# Altium PCB E03_DAQ.PcbDoc
Units mm, origin at the board's own origin, x right, y up, seen from the top; angles counter-clockwise.
Board outline 113.79 x 123.19 mm, 2 copper layers (Top Layer, Bottom Layer); 49 components, 66 nets, 261 pads, 31 vias.
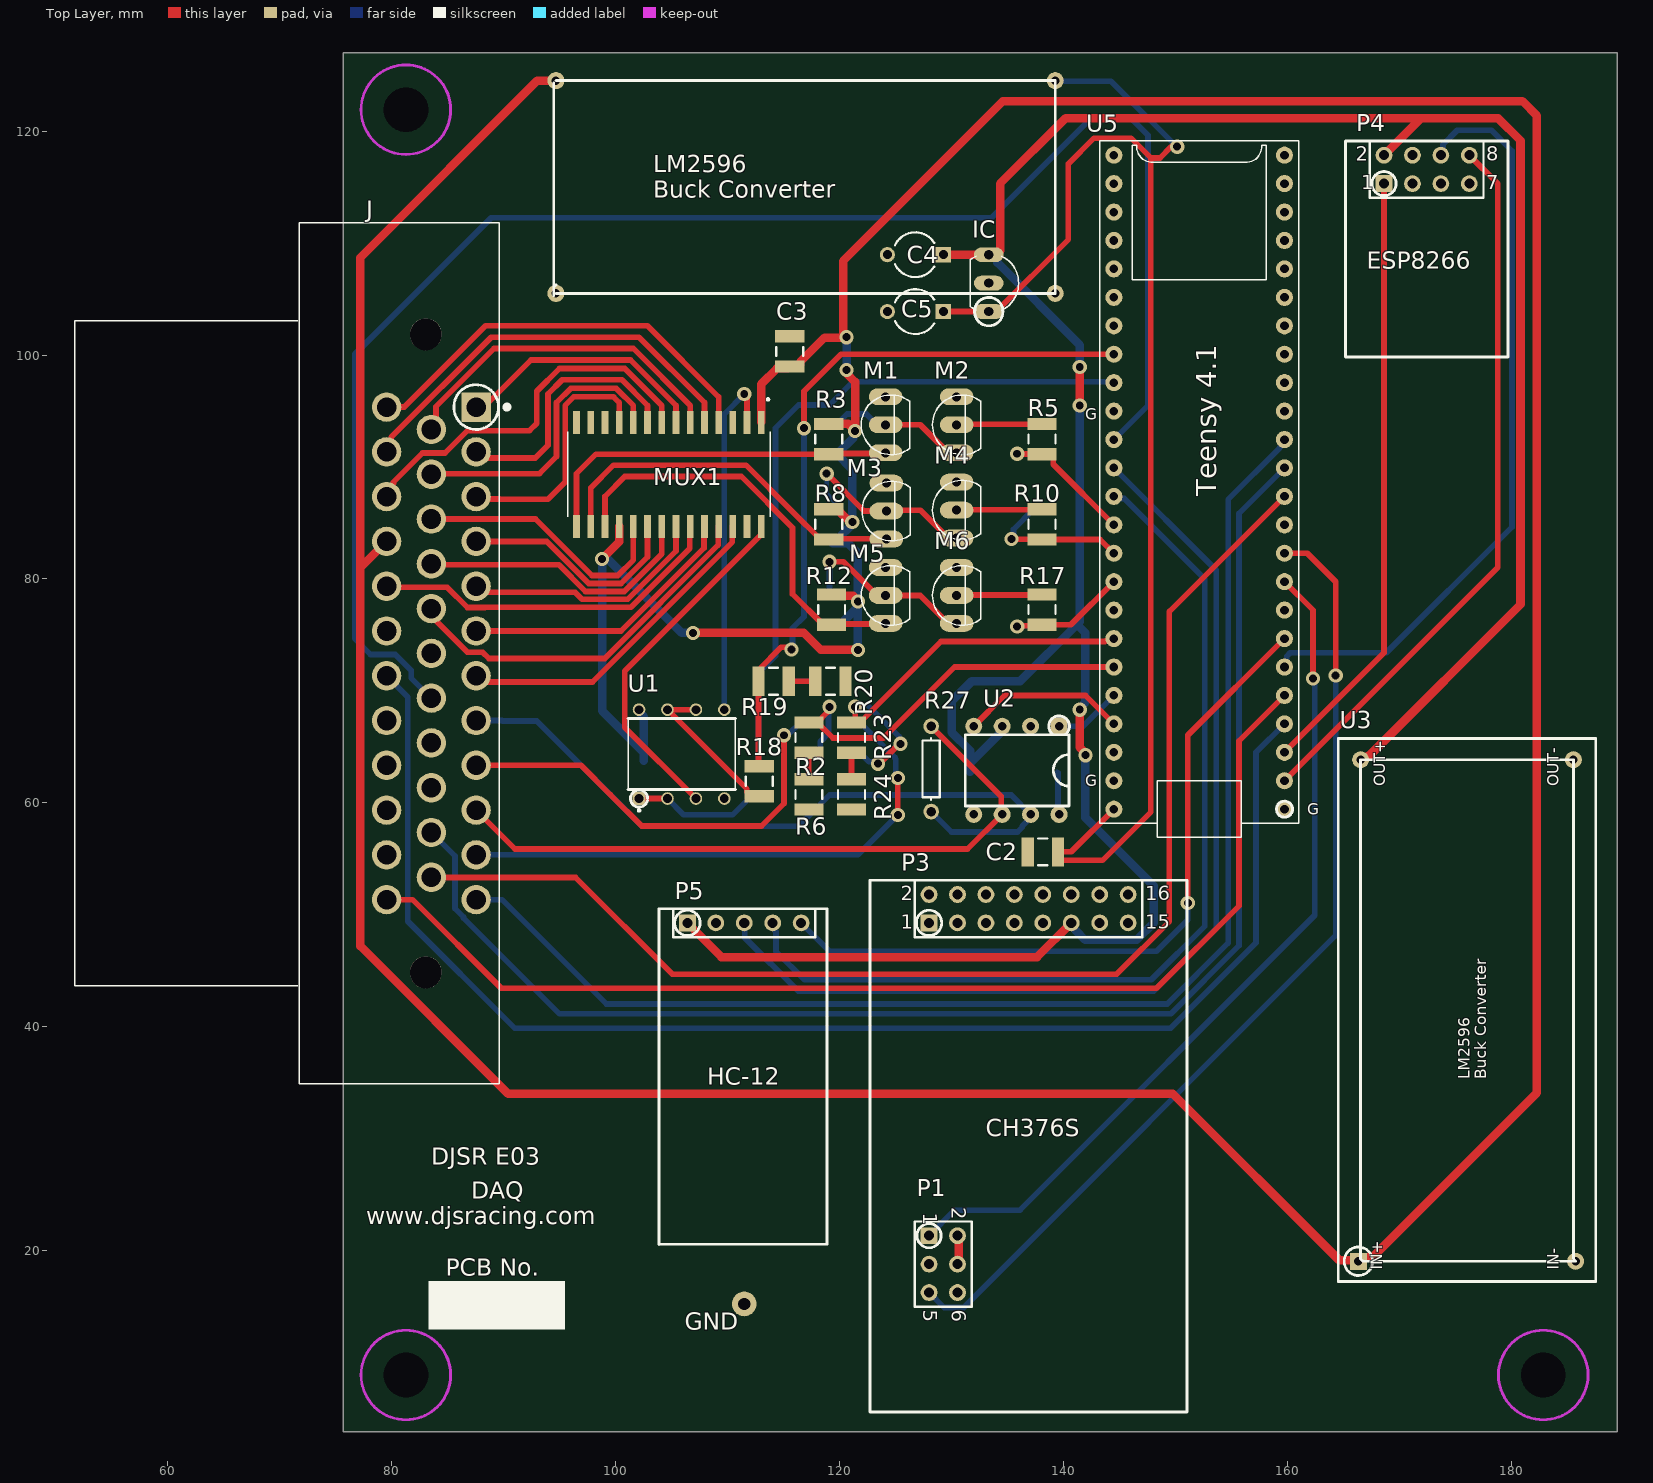
[diagram p0: Top Layer view]
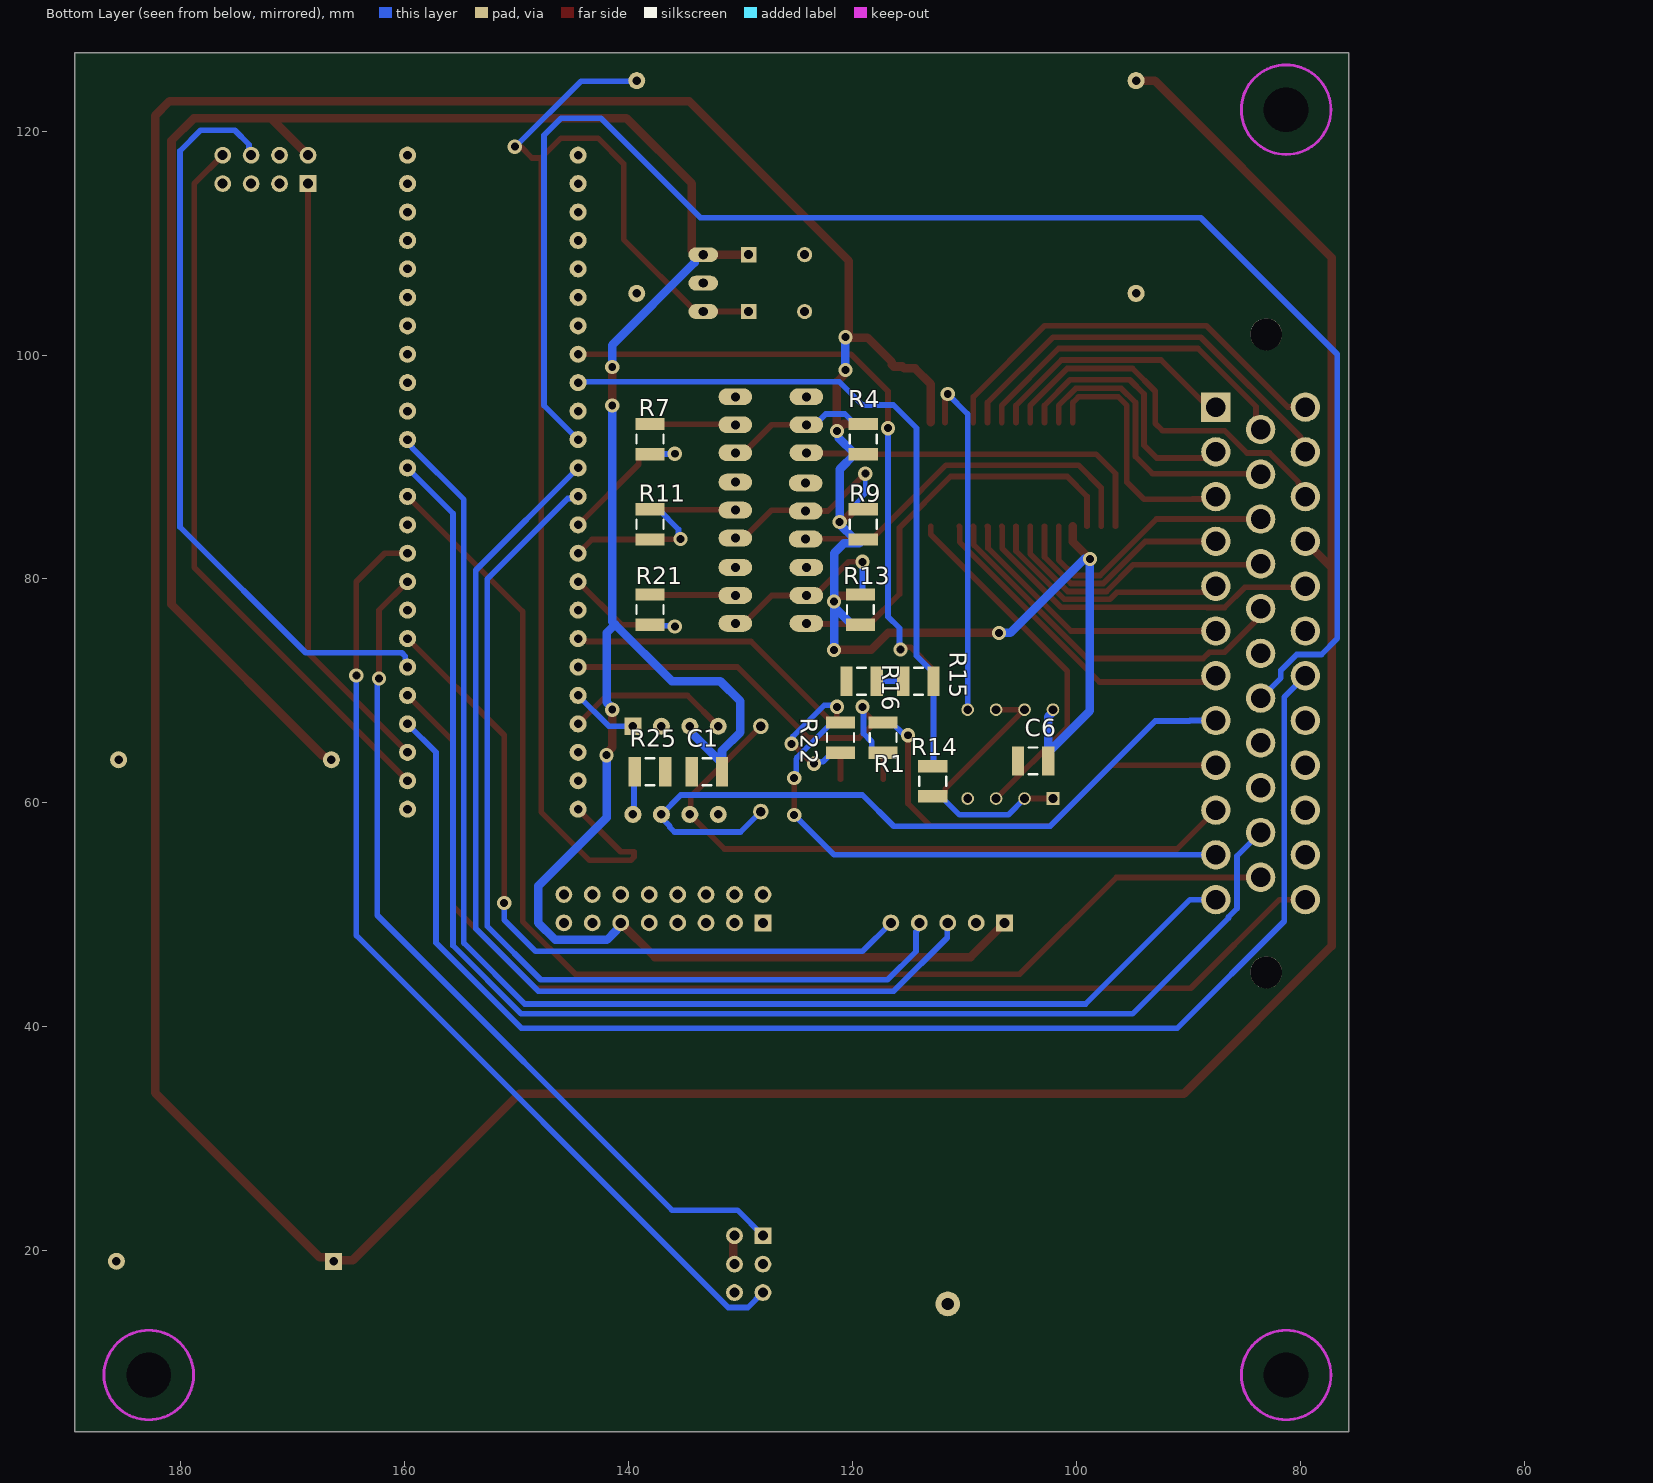
[diagram p1: Bottom Layer view, seen from below]

## Layer stack, top to bottom
Top Solder: solder mask 0.0102, Solder Resist, Dk 3.5
Top Layer: signal copper 0.0356
Dielectric 1: dielectric 0.32, FR-4, Dk 4.8
Bottom Layer: signal copper 0.0356
Bottom Solder: solder mask 0.0102, Solder Resist, Dk 3.5

## Board outline
75.692,3.81 189.484,3.81 189.484,127 75.692,127

## Design rules (kind name [scope] priority, off if disabled: settings)
Clearance [All] p1: gap=0.2 ignorepadtopadclearanceinfootprint=FALSE except(0.127: SMDPad-SMDPad; 0.254: Arc-Via Arc-Hole Track-Via Track-Hole Via-Via; 0.33: Arc-THPad Track-THPad; 0.54: THPad-THPad)
PolygonConnect [All] p1: connectstyle=Relief reliefconductorwidth=0.254 reliefentries=4 polygonreliefangle="90 Angle" airgapwidth=0.254
RoutingVias [All] p1: holewidth=0.711 width=1.27 viastyle="Through Hole" minholewidth=0.711 minwidth=1.27 maxholewidth=0.711 maxwidth=1.27
SolderMaskExpansion [All] p1: expansion=0.102
Width [All] p1: maxlimit=1.016 minlimit=0.381 preferedwidth=0.508
30 further rules are at their usual default settings.

## Components (designator, comment, footprint, x,y, rotation, side; value= is the part's Value field where it differs from the comment)
C1 "Cap Semi" C1210 133.024,62.782 r180 bottom value=100pF
C2 "Cap Semi" C1210 138.176,55.626 r0 top value=100pF
C3 "Cap Semi" C1210 115.57,100.33 r270 top value=100pF
C4 "Cap2" CAPR5-4X5 126.786,108.966 r180 top value=100pF
C5 "Cap2" CAPR5-4X5 126.786,103.886 r180 top value=100pF
C6 "Cap Semi" C1210 103.886,63.754 r180 bottom value=100pF
IC "L78L33ACZ" TO92 133.35,106.426 r90 top
J "776163-1" TE_776163-1 83.058,73.354 r270 top
M1 "BS170" TRANSISTOR_TO-92 124.134,93.77 r90 top
M2 "BS170" TRANSISTOR_TO-92 130.484,93.77 r90 top
M3 "BS170" TRANSISTOR_TO-92 124.206,86.066 r90 top
M4 "BS170" TRANSISTOR_TO-92 130.484,86.15 r90 top
M5 "BS170" TRANSISTOR_TO-92 124.134,78.53 r90 top
M6 "BS170" TRANSISTOR_TO-92 130.484,78.53 r90 top
MUX1 "Component_1" *SOIC127P1030X265-28N 104.775,89.34 r270 top
P1 "Header 3X2" HDR2X3 128.016,21.336 r270 top
P3 "CH376S Header 1" HDR2X8 128.016,49.276 r0 top
P4 "ESP8266" HDR2X4 168.656,115.316 r0 top
P5 "HC-12" HDR1X5 106.426,49.276 r0 top
R1 "Res3" 14-1210 117.276,65.83 r270 bottom value=1K
R2 "Res3" 14-1210 117.276,65.83 r270 top value=1K
R3 "Res3" 14-1210 119.054,92.5 r90 top value=1K
R4 "Res3" 14-1210 119.054,92.5 r270 bottom value=1M
R5 "Res3" 14-1210 138.104,92.5 r90 top value=1M
R6 "Res3" 14-1210 117.276,60.75 r270 top value=1K
R7 "Res3" 14-1210 138.104,92.5 r270 bottom value=1K
R8 "Res3" 14-1210 119.054,84.88 r90 top value=1K
R9 "Res3" 14-1210 119.054,84.88 r90 bottom value=1M
R10 "Res3" 14-1210 138.104,84.88 r90 top value=1M
R11 "Res3" 14-1210 138.104,84.88 r90 bottom value=1K
R12 "Res3" 14-1210 119.308,77.26 r90 top value=1K
R13 "Res3" 14-1210 119.308,77.26 r90 bottom value=1M
R14 "Res3" 14-1210 112.848,61.932 r90 bottom value=1K
R15 "Res3" 14-1210 114.126,70.866 r0 bottom value=1K
R16 "Res3" 14-1210 119.206,70.866 r0 bottom value=1K
R17 "Res3" 14-1210 138.104,77.26 r90 top value=1M
R18 "Res3" 14-1210 112.848,61.932 r90 top value=1K
R19 "Res3" 14-1210 114.126,70.866 r0 top value=1K
R20 "Res3" 14-1210 119.206,70.866 r0 top value=1K
R21 "Res3" 14-1210 138.104,77.26 r270 bottom value=1K
R22 "Res3" 14-1210 121.086,65.83 r270 bottom value=1K
R23 "Res3" 14-1210 121.086,65.83 r270 top value=1K
R24 "Res3" 14-1210 121.086,60.75 r270 top value=1K
R25 "Res3" 14-1210 138.104,62.782 r180 bottom value=10K
R27 "Res1" AXIAL-0.3 128.198,63.036 r270 top value=120
U1 "LM358AP" DIP794W45P254L959H508Q8 105.918,64.356 r90 top
U2 "MCP2551 IC" PCBComponent_1#1 139.628,66.846 r180 top
U3 "DC_DC Converter" PCBComponent_1#2 185.77,19.05 r90 top
U5 "Teensy" PCBComponent_1#3 157.48,91.694 r180 top

## Footprints (in the part's own frame and the unit in brackets; to place one, negate y for a bottom-side part, rotate by r counter-clockwise, add the part's x,y. Pads: shape width x height; smd on the part's side, far side on the other; paste and mask are expansions set on the pad)
14-1210 [mm] "Chip Resistor, Body 3.2x2.5mm, IPC High Density"
  rect 1.1x2.6 smd: 1(-1.35,0) 2(1.35,0)
  silkscreen extent -0.4,-1.2 0.4,1.2, body extent -1.68,-1.32 1.68,1.32, height 0.9
*SOIC127P1030X265-28N [mm]
  rect 2.06x0.6 smd: 1(-4.64,8.255) 2(-4.64,6.985) 3(-4.64,5.715) 4(-4.64,4.445) 5(-4.64,3.175) 6(-4.64,1.905) 7(-4.64,0.635) 8(-4.64,-0.635) 9(-4.64,-1.905) 10(-4.64,-3.175) 11(-4.64,-4.445) 12(-4.64,-5.715) 13(-4.64,-6.985) 14(-4.64,-8.255) 15(4.64,-8.255) 16(4.64,-6.985) 17(4.64,-5.715) 18(4.64,-4.445) 19(4.64,-3.175) 20(4.64,-1.905) 21(4.64,-0.635) 22(4.64,0.635) 23(4.64,1.905) 24(4.64,3.175) 25(4.64,4.445) 26(4.64,5.715) 27(4.64,6.985) 28(4.64,8.255)
  silkscreen extent -6.8,-9.05 3.8,9.05
AXIAL-0.3 [mm] "Axial Device, Thru-Hole; 2 Leads; 0.3 in Pin Spacing"
  round 1.4 hole 0.85: 1(-3.81,0) 2(3.81,0)
  silkscreen extent -2.77,-0.76 2.77,0.76
C1210 [mm] "Chip Capacitor, Body 3.2x2.5mm, IPC High Density"
  rect 1.1x2.6 smd: 1(-1.35,0) 2(1.35,0)
  silkscreen extent -0.4,-1.2 0.4,1.2, body extent -1.7,-1.35 1.7,1.35, height 1.3
CAPR5-4X5 [mm] "Capacitor; 2 Leads"
  rect 1.35x1.35 hole 0.8: 1(-2.5,0)
  round 1.35 hole 0.8: 2(2.5,0)
  silkscreen extent -1.69,-2 1.82,2
DIP794W45P254L959H508Q8 [mm]
  rect 1.13x1.13 hole 0.78: 1(-3.97,3.81)
  round 1.13 hole 0.78: 2(-3.97,1.27) 3(-3.97,-1.27) 4(-3.97,-3.81) 5(3.97,-3.81) 6(3.97,-1.27) 7(3.97,1.27) 8(3.97,3.81)
  silkscreen extent -5.13,-4.8 3.17,4.8
HDR1X5 [mm] "Connector; Header; 5 Position"
  rect 1.5x1.5 hole 0.9: 1(0,0)
  round 1.5 hole 0.9: 2(2.54,0) 3(5.08,0) 4(7.62,0) 5(10.16,0)
  silkscreen extent -1.27,-1.27 11.43,1.27
HDR2X3 [mm] "Connector; Header; 3x2 Position"
  rect 1.5x1.5 hole 0.9: 1(0,0)
  round 1.5 hole 0.9: 2(0,2.54) 3(2.54,0) 4(2.54,2.54) 5(5.08,0) 6(5.08,2.54)
  silkscreen extent -1.27,-1.27 6.35,3.81
HDR2X4 [mm] "Connector; Header; 4x2 Position"
  rect 1.5x1.5 hole 0.9: 1(0,0)
  round 1.5 hole 0.9: 2(0,2.54) 3(2.54,0) 4(2.54,2.54) 5(5.08,0) 6(5.08,2.54) 7(7.62,0) 8(7.62,2.54)
  silkscreen extent -1.27,-1.27 8.89,3.81
HDR2X8 [mm] "Connector; Header; 8x2 Position"
  rect 1.5x1.5 hole 0.9: 1(0,0)
  round 1.5 hole 0.9: 2(0,2.54) 3(2.54,0) 4(2.54,2.54) 5(5.08,0) 6(5.08,2.54) 7(7.62,0) 8(7.62,2.54) 9(10.16,0) 10(10.16,2.54) 11(12.7,0) 12(12.7,2.54) 13(15.24,0) 14(15.24,2.54) 15(17.78,0) 16(17.78,2.54)
  silkscreen extent -1.27,-1.27 19.05,3.81
PCBComponent_1#1 [mil]
  rect 60x60 hole 30: 1(0,0)
  round 60 hole 30: 2(100,0) 3(200,0) 4(300,0) 5(300,310) 6(200,310) 7(100,310) 8(0,310)
  silkscreen extent -35,30 330,280
PCBComponent_1#2 [mil]
  rect 60x60 hole 30: 1(0,763.78)
  round 60 hole 30: 2(0,0) 3(1763.78,755.91) 4(1763.78,7.87)
  silkscreen extent -71,-71 1839,835
PCBComponent_1#3 [mil]
  round 60 hole 30: 1(-90,1270) 2(-90,1170) 3(-90,1070) 4(-90,970) 5(-90,870) 6(-90,770) 7(-90,670) 8(-90,570) 9(-90,470) 10(-90,370) 11(-90,270) 12(-90,170) 13(-90,70) 14(-90,-30) 15(-90,-130) 16(-90,-230) 17(-90,-330) 18(-90,-430) 19(-90,-530) 20(-90,-630) 21(-90,-730) 22(-90,-830) 23(-90,-930) 24(-90,-1030) 25(510,-1030) 26(510,-930) 27(510,-830) 28(510,-730) 29(510,-630) 30(510,-530) 31(510,-430) 32(510,-330) 33(510,-230) 34(510,-130) 35(510,-30) 36(510,70) 37(510,170) 38(510,270) 39(510,370) 40(510,470) 41(510,570) 42(510,670) 43(510,770) 44(510,870) 45(510,970) 46(510,1070) 47(510,1170) 48(510,1270)
  silkscreen extent -140,-1080 560,1369
TE_776163-1 [mm]
  rect 2.625x2.625 hole 1.75: 1(-22,4.5)
  round 2.625 hole 1.75: 2(-18,4.5) 3(-14,4.5) 4(-10,4.5) 5(-6,4.5) 6(-2,4.5) 7(2,4.5) 8(6,4.5) 9(10,4.5) 10(14,4.5) 11(18,4.5) 12(22,4.5) 13(-20,0.5) 14(-16,0.5) 15(-12,0.5) 16(-8,0.5) 17(-4,0.5) 18(0,0.5) 19(4,0.5) 20(8,0.5) 21(12,0.5) 22(16,0.5) 23(20,0.5) 24(-22,-3.5) 25(-18,-3.5) 26(-14,-3.5) 27(-10,-3.5) 28(-6,-3.5) 29(-2,-3.5) 30(2,-3.5) 31(6,-3.5) 32(10,-3.5) 33(14,-3.5) 34(18,-3.5) 35(22,-3.5)
  round 2.85 hole 2.85 unplated: ""(-28.5,0) ""(28.5,0)
  silkscreen extent -38.45,-31.35 38.45,7.45
TO92 [mil]
  oval 52x104 hole 32: 1(-100,0) 2(0,0) 3(100,0)
  silkscreen extent -95,-105 95,65
TRANSISTOR_TO-92 [mm]
  oval 1.5x3 hole 0.8: P$1(2.5,0) P$2(0,0) P$3(-2.5,0)
  silkscreen extent -2.67,-2.15 2.66,2.17

## Part data
C1 C2 C3 C6: "Capacitor (Semiconductor SIM Model)", LatestRevisionDate=29-May-2009, LatestRevisionNote="IPC-7351 Footprint Added.", PackageDescription="Chip Capacitor", PackageReference=C1206, Published=8-Jun-2000, Publisher="Altium Limited"
C4 C5: "Capacitor", PackageDescription="Capacitor; 2 Leads", PackageReference=CAPR5-4X5, Published=23-Sep-2002, Publisher="Altium Limited"
IC: "Linear Voltage Regulator IC 1 Output 100mA TO-92-3", Package="TO-92 STMicroelectronics", Availability=Unavailable, MF=STMicroelectronics, MP=L78L33ACZ, Price=None, SnapEDA_Link=https://www.snapeda.com/parts/L78L33ACZ/STMicroelectronics/view-part/50061/?ref=snap
J: "Rectangular Power Connector, AMPSEAL Series, Through Hole, Plug, 35, 4 mm, Pin", Package=None, Digi-Key_Part_Number=A106460-ND, Digi-Key_Purchase_URL=https://www.digikey.com/product-detail/en/te-connectivity-amp-connectors/776163-1/A106460-ND/2327364?utm_source=snapeda&utm_medium=aggregator&utm_campaign=symbol, EU_RoHS_Compliance=Compliant, MF="TE Connectivity", MP=776163-1, SnapEDA_Link=https://www.snapeda.com/parts/776163-1/TE%20Connectivity%20AMP%20Connectors/view-part/546665/?ref=snap, TE_purchase_URL=https://www.te.com/usa-en/product-776163-1.html?te_bu=Cor&te_type=disp&te_campaign=seda_glo_cor-seda-global-disp-prtnr-fy19-seda-model-bom-cta_sma-317_1&elqCampaignId=32493
M1 M2 M3 M4 M5 M6: "N-Channel 60V 500mA (Ta) 830mW (Ta) Through Hole TO-92-3", Package="TO-92 ON Semiconductor", Arrow_Electronics-Purchase-URL=https://snapeda.com/shop?store=Arrow+Electronics&id=4775089, Availability=Good, DigiKey-Purchase-URL=https://snapeda.com/shop?store=DigiKey&id=4775089, MF="ON Semiconductor", Mouser-Purchase-URL=https://snapeda.com/shop?store=Mouser&id=4775089, MP=BS170, Price=None, SnapEDA_Link=https://www.snapeda.com/parts/BS170/ON%20Semiconductor/view-part/4775089/?ref=snap
P1: "Header, 3-Pin, Dual row", LatestRevisionDate=17-Jul-2002, LatestRevisionNote="Re-released for DXP Platform.", Publisher="Altium Limited"
P3: library part "Header 8X2", "Header, 8-Pin, Dual row", LatestRevisionDate=17-Jul-2002, LatestRevisionNote="Re-released for DXP Platform.", Publisher="Altium Limited"
P4: library part "Header 4X2", "Header, 4-Pin, Dual row", LatestRevisionDate=17-Jul-2002, LatestRevisionNote="Re-released for DXP Platform.", Publisher="Altium Limited"
P5: library part "Header 5", "Header, 5-Pin", LatestRevisionDate=17-Jul-2002, LatestRevisionNote="Re-released for DXP Platform.", Publisher="Altium Limited"
R1 R2 R3 R4 R5 R6 R7 R8 R9 R10 R11 R12 R13 R14 R15 R16 R17 R18 R19 R20 R21 R22 R23 R24 R25 R27: "Resistor", Published=8-Jun-2000, Publisher="Altium Limited"
  R1 R2 R3 R4 R5 R6 R7 R8 R9 R10 R11 R12 R13 R14 R15 R16 R17 R18 R19 R20 R21 R22 R23 R24 R25: LatestRevisionDate=29-May-2009, LatestRevisionNote="IPC-7351 Footprint Added.", PackageDescription="Chip Resistor", PackageReference=J1-0603
  R27: LatestRevisionDate=17-Jul-2002, LatestRevisionNote="Re-released for DXP Platform.", PackageDescription="Axial Device, Thru-Hole; 2 Leads; 0.3 in Pin Spacing", PackageReference=AXIAL-0.3
U1: "Dual improved offset, standard operational amplifier<br /> &nbsp; 8-PDIP 0 to 70", Package="PDIP-8 Texas Instruments", Availability=Unavailable, MF="Texas Instruments", MP=LM358AP, Price=None, SnapEDA_Link=https://www.snapeda.com/parts/LM358AP/Texas%20Instruments/view-part/214423/?ref=snap, Texas_Instruments-Purchase-URL=https://snapeda.com/shop?store=Texas+Instruments&id=214423
U2: library part MCP2551
U3: library part LM2576
U5: library part "Teensy 4.1"

## Free pads (board coordinates)
  round 2.2 hole 1.1: 2(111.506,15.24)
  round 1.524 hole 0.762: 6(94.688,105.514) 6(94.688,124.514) 6(139.288,105.514) 6(139.288,124.514)
  round 1.524 hole 4: 7(81.28,8.89) 7(81.28,121.92) 7(182.88,8.89)

## Via types
v1: diameter 1.27, hole 0.711, Top Layer to Bottom Layer, 31 vias

## Nets (pads, with @x,y where several pads share a name; then routed paths per layer and width w, separated by ;. In a path a pad name is that pad's centre, name@x,y a point inside that pad or via, vN(x,y) a via of type N, cw(c..) or ccw(c..) an arc to the next point about the centre after c; other vN are vias at no path point)
1OUT: R14.1 U1.1 U1.2 | length 12
  Top Layer w0.508: U1.1 U1.2
  Bottom Layer w0.508: U1.2 106.106,58.928 110.444,58.928 112.098,60.582 R14.1
2OUT: R18.1 U1.6 U1.7 | length 14.1
  Top Layer w0.508: U1.6 U1.7 111.739,61.235 111.739,60.942 112.098,60.582 R18.1
3.3V: C2.2 C5.1 IC.1 pad.6@139.288,124.514 U5.48 | length 121.4
  Top Layer w0.508: C5.1 IC.1 134.01,103.886 140.462,110.338 140.462,117.094 142.748,119.38 146.05,119.38 147.828,117.602 ; U5.48 140.716,55.626 C2.2 139.526,55.16 139.822,54.864 143.51,54.864 147.828,59.182 147.828,117.602 ; v1(150.177,118.618) 149.654,118.618 148.638,117.602 147.828,117.602
  Bottom Layer w0.508: pad.6@139.288,124.514 139.342,124.46 144.272,124.46 150.114,118.618 v1(150.177,118.618)
5V: C1.2 C4.1 IC.3 P3.11 P4.2 P5.1 U2.3 U3.3 | length 264.8
  Top Layer w0.508: IC.3 134.01,108.966 IC.3@134.366,109.322
  Top Layer w0.762: P5.1 109.474,46.228 137.668,46.228 P3.11 ; C4.1 IC.3 ; IC.3@134.366,109.322 134.366,115.316 140.208,121.158 171.958,121.158 ; v1(141.478,68.326) 141.478,64.952 141.986,64.444 v1(141.986,64.262) ; v1(141.478,95.504) v1(141.478,98.933) ; U3.3@166.828,63.799 167.239,64.21 167.334,64.21 180.848,77.724 180.848,119.157 178.847,121.158 171.958,121.158 ; P4.2 171.958,121.158
  Bottom Layer w0.762: C1.2 C1.2@131.674,63.532 ; IC.3@133.246,109.07 133.755,109.07 134.117,108.708 134.117,108.259 141.478,100.898 v1(141.478,98.933) ; U2.3 134.329,66.627 134.329,66.187 C1.2@131.674,63.532 ; P3.11 140.716,49.008 141.133,48.591 141.133,48.571 141.951,47.752 146.558,47.752 148.082,49.276 148.082,52.578 141.986,58.674 v1(141.986,64.262) ; v1(141.478,68.326) 141.478,68.486 141.986,68.994 141.986,75.184 141.224,75.946 ; v1(141.478,95.504) 141.478,76.2 141.224,75.946 ; C1.2@131.674,63.532 131.674,64.668 130.048,66.294 130.048,69.088 131.826,70.866 136.144,70.866 141.224,75.946
+12: C3.2 C6.2 J.27 MUX1.1 MUX1.18 pad.6@94.688,124.514 R3.2 R4.2 R8.2 R9.1 R12.2 R13.1 U1.8 U3.1 | length 483.5
  Top Layer w0.381: R8.2 R8.2@119.804,86.23 ; v1@120.944,85.09 v1(121.158,85.09)
  Top Layer w0.762: J.27 77.216,81.012 ; pad.6@94.688,124.514 93.018,124.514 77.216,108.712 77.216,81.012 ; v1(98.806,81.788) 100.328,83.31 100.328,84.698 MUX1.18 ; v1(106.934,75.184) 116.84,75.184 118.364,73.66 v1(121.666,73.66) ; MUX1.1 113.03,97.412 114.429,98.811 115.401,98.811 C3.2 116.32,98.98 116.489,99.149 116.489,99.371 118.686,101.568 120.618,101.568 v1(120.65,101.6) 120.65,101.737 120.339,102.048 120.339,108.401 134.62,122.682 181.013,122.682 182.315,121.38 182.315,34.108 167.622,19.414 166.734,19.414 U3.1 166.271,19.149 164.657,19.149 149.803,34.004 90.424,34.004 77.216,47.212 77.216,81.012 ; R3.2 120.778,93.85 121.41,93.218 v1(121.412,93.218) 121.412,97.608 120.65,98.37 v1(120.65,98.679) ; R12.2 119.432,78.486 121.237,78.486 ; R8.2@119.804,86.23 v1@120.944,85.09
  Bottom Layer w0.381: R13.1 R13.1@120.058,75.91 ; v1@120.65,98.615 v1(120.65,98.679)
  Bottom Layer w0.762: U1.8 102.108,68.123 102.536,67.695 C6.2@102.536,64.504 ; C6.2 C6.2@102.536,64.504 ; v1(106.934,75.184) 105.918,75.184 99.314,81.788 v1(98.806,81.788) 98.806,68.234 C6.2@102.536,64.504 ; R4.2 R4.2@119.804,91.15 ; R13.1@120.058,75.91 121.496,77.348 ; v1(120.65,98.679) v1(120.65,101.6) ; 121.242,92.588 R4.2@119.804,91.15 ; v1(121.666,73.66) v1(121.666,77.978) 121.666,82.296 120.792,83.17 119.414,83.17 R9.1 119.804,83.53 121.158,84.884 v1(121.158,85.09) 121.158,89.796 R4.2@119.804,91.15
A0: M5.P$3 MUX1.17 R12.1 | length 37.5
  Top Layer w0.508: MUX1.17 99.06,87.376 100.838,89.154 111.252,89.154 115.824,84.582 115.824,78.644 118.558,75.91 R12.1 119.368,75.97 124.074,75.97 M5.P$3
A1: M3.P$3 MUX1.16 R8.1 | length 33.3
  Top Layer w0.508: MUX1.16 97.79,88.138 99.822,90.17 111.664,90.17 115.824,86.01 118.304,83.53 R8.1 119.114,83.59 M3.P$3@124.074,83.59
A2: M1.P$3 MUX1.15 R3.1 | length 33.1
  Top Layer w0.381: R3.1 R3.1@119.114,91.21 ; M1.P$3@124.074,91.21 M1.P$3
  Top Layer w0.508: MUX1.15 96.52,89.408 98.262,91.15 R3.1 ; R3.1@119.114,91.21 M1.P$3@124.074,91.21
CAN_RX: U2.4 U5.45 | length 14.7
  Top Layer w0.508: U2.4 134.758,69.596 141.986,69.596 U5.45
CAN_TX: U2.1 U5.44 | length 6
  Bottom Layer w0.508: U2.1 141.776,66.846 U5.44
CANH: J.8 R27.2 U2.7 | length 65.8
  Bottom Layer w0.508: J.8 89.874,67.354 89.918,67.31 92.964,67.31 102.362,57.912 116.338,57.912 119.132,60.706 135.354,60.706 U2.7 137.088,58.663 136.33,57.905 136.33,57.814 135.921,57.404 130.02,57.404 R27.2
CANL: J.10 R27.1 U2.6 | length 60.2
  Top Layer w0.508: J.10 91.032,55.88 131.456,55.88 U2.6 134.463,59.057 134.463,60.581 R27.1
CH_EN: P4.6 U5.6 | length 68
  Bottom Layer w0.508: U5.6 159.956,72.326 159.956,73.086 160.276,73.406 168.862,73.406 180.088,84.632 180.088,118.24 178.249,120.079 175.199,120.079 173.917,118.797 173.917,118.037 P4.6
CH_RX: P1.5 U5.10 | length 87.9
  Top Layer w0.508: U5.10 161.798,82.296 164.338,79.756 v1(164.338,71.374)
  Bottom Layer w0.508: P1.5 128.029,16.256 129.363,14.922 131.109,14.922 164.335,48.148 164.335,71.371 v1(164.338,71.374)
CH_TX: P1.1 U5.9 | length 77.2
  Top Layer w0.508: U5.9 162.306,77.216 v1(162.306,71.12)
  Bottom Layer w0.508: P1.1 130.302,23.622 136.144,23.622 162.476,49.954 162.476,70.95 v1(162.306,71.12)
CS: J.23 U5.12 | length 113.7
  Top Layer w0.508: J.23@83.558,53.34 96.442,53.34 105.078,44.704 144.78,44.704 149.479,49.403 149.479,77.089 U5.12
D0: R17.1 R21.2 U5.40 | length 12.6
  Top Layer w0.508: v1(135.89,75.755) 135.967,75.833 138.027,75.833 R17.1 140.68,75.91 U5.40
  Bottom Layer w0.508: v1(135.89,75.755) 135.967,75.833 138.027,75.833 R21.2
D1: R10.1 R11.2 U5.39 | length 13.9
  Top Layer w0.508: v1(135.382,83.566) 135.4,83.548 138.086,83.548 R10.1 143.292,83.53 U5.39
  Bottom Layer w0.508: v1(135.382,83.566) 135.552,83.736 135.552,84.428 137.354,86.23 R11.2
D2: R5.1 R7.2 U5.38 | length 13.9
  Top Layer w0.508: v1(135.89,91.186) 135.908,91.168 138.086,91.168 R5.1 138.818,91.15 139.114,90.854 139.114,90.248 U5.38
  Bottom Layer w0.381: v1(135.89,91.186) v1@135.908,91.168 ; R7.2@138.086,91.168 R7.2
  Bottom Layer w0.508: v1@135.908,91.168 R7.2@138.086,91.168
DA: MUX1.28 U1.3 | length 32
  Top Layer w0.508: U1.3 100.838,66.736 100.838,71.778 113.03,83.97 MUX1.28
DB: MUX1.2 U1.5 | length 31.6
  Top Layer w0.508: v1(111.506,96.52) 111.506,96.314 111.76,96.06 MUX1.2
  Bottom Layer w0.508: U1.5 109.728,94.742 v1(111.506,96.52)
DC: J.30 U5.4 | length 126.2
  Bottom Layer w0.508: J.30 81.454,69.457 81.454,49.421 90.998,39.878 149.606,39.878 157.226,47.498 157.226,64.516 U5.4
ESP_RX: P4.1 U5.3 | length 54.5
  Top Layer w0.508: U5.3 168.656,73.406 P4.1
ESP_TX: P4.8 U5.2 | length 64.8
  Top Layer w0.508: U5.2 178.817,81.027 178.817,115.313 176.276,117.853 P4.8
GND: C1.1 C2.1 C3.1 C4.2 C5.2 C6.1 IC.2 J.20 M1.P$1 M2.P$1 M3.P$1 M4.P$1 M5.P$1 M6.P$1 MUX1.12 MUX1.27 P1.3 P3.15 P4.7 P5.2 pad.2 pad.6@94.688,105.514 pad.6@139.288,105.514 R6.2 R7.1 R11.1 R16.2 R20.2 R21.1 R24.2 R25.2 U1.4 U2.2 U3.2 U3.4 U5.1
HC-12_RX: P5.3 U5.36 | length 92.7
  Bottom Layer w0.508: P5.3 111.558,49.224 111.558,47.954 116.332,43.18 148.082,43.18 153.67,48.768 153.67,80.772 U5.36
HC-12_SET: P5.5 U5.7 | length 65.5
  Top Layer w0.508: v1(151.13,51.054) 151.13,66.04 U5.7
  Bottom Layer w0.508: P5.5 119.123,46.739 148.339,46.739 151.13,49.53 v1(151.13,51.054)
HC-12_TX: P5.4 U5.37 | length 86.2
  Bottom Layer w0.508: P5.4 114.236,49.086 114.236,48.59 114.343,48.482 114.343,46.736 116.883,44.196 147.862,44.196 152.654,48.988 152.654,79.98 145.452,87.182 144.72,87.182 U5.37
MISO: J.12 U5.14 | length 120.4
  Bottom Layer w0.508: J.12 89.874,51.354 99.192,42.036 149.288,42.036 154.729,47.477 154.729,87.101 159.356,91.727 159.356,91.771 159.766,92.181 U5.14
MOSI: J.22 U5.13 | length 128.5
  Bottom Layer w0.508: J.22 85.662,55.251 85.662,50.568 86.424,49.806 86.424,49.72 94.996,41.148 149.606,41.148 155.702,47.244 155.702,85.852 U5.13
NetM1_P$2: M1.P$2 M2.P$3 R4.1 | length 13.2
  Top Layer w0.508: M1.P$2 127.234,93.77 129.734,91.27 M2.P$3
  Bottom Layer w0.508: R4.1 119.804,93.85 120.696,94.742 122.412,94.742 123.384,93.77 M1.P$2
NetM2_P$2: M2.P$2 R5.2 | length 7.7
  Top Layer w0.508: M2.P$2 130.524,93.81 138.064,93.81 R5.2
NetM3_P$2: M3.P$2 M4.P$3 R9.2 | length 18.3
  Top Layer w0.508: v1(118.872,89.408) 122.214,86.066 M3.P$2 ; M3.P$2@124.134,86.15 127.234,86.15 129.734,83.65 M4.P$3
  Bottom Layer w0.381: v1(118.872,89.408) 118.872,87.606 119.888,86.59 119.528,86.23 R9.2
NetM4_P$2: M4.P$2 R10.2 | length 7.7
  Top Layer w0.508: M4.P$2 130.524,86.19 138.064,86.19 R10.2
NetM5_P$2: M5.P$2 M6.P$3 R13.2 | length 16.6
  Top Layer w0.508: v1(119.126,81.534) 120.38,81.534 123.384,78.53 M5.P$2 127.234,78.53 129.734,76.03 M6.P$3
  Bottom Layer w0.508: v1(119.126,81.534) 119.126,78.792 R13.2
NetM6_P$2: M6.P$2 R17.2 | length 7.7
  Top Layer w0.508: M6.P$2 130.524,78.57 138.064,78.57 R17.2
NetP1_2: P1.2 P1.4 | length 5.1
  Top Layer w0.508: P1.4 P1.2 ; P1.4@130.81,18.542 P1.2@130.81,21.082
NetR2_2: R2.2 R6.1 | length 2.4
  Top Layer w0.508: R6.1 R2.2
NetR15_2: R15.2 R16.1 | length 2.4
  Bottom Layer w0.508: R15.2 R16.1
NetR19_2: R19.2 R20.1 | length 2.4
  Top Layer w0.508: R19.2 R20.1
NetR23_2: R23.2 R24.1 | length 2.4
  Top Layer w0.508: R24.1 R23.2
NetR25_1: R25.1 U2.8 | length 3.9
  Bottom Layer w0.381: R25.1 R25.1@139.541,62.695 ; U2.8@139.541,59.059 U2.8
  Bottom Layer w0.508: U2.8@139.541,59.059 R25.1@139.541,62.695
OA: R14.2 R15.1 U5.33 | length 62.8
  Bottom Layer w0.508: R14.2 112.776,63.354 R15.1 112.776,71.616 114.3,73.14 114.3,93.472 116.366,95.538 119.125,95.538 121.191,97.604 144.458,97.604 U5.33
OB: R18.2 R19.1 U5.32 | length 65.1
  Top Layer w0.508: R18.2 112.776,63.354 R19.1 112.776,71.882 114.808,73.914 115.517,73.914 v1(115.734,73.697) ; v1(116.84,93.472) 116.84,96.774 120.142,100.076 U5.32
  Bottom Layer w0.508: v1(115.734,73.697) 115.824,73.787 115.824,75.609 116.84,76.625 v1(116.84,93.472)
RST: J.35 U5.5 | length 103
  Top Layer w0.508: J.35 81.874,51.354 89.794,43.434 148.336,43.434 155.702,50.8 155.702,65.532 U5.5
SCK: J.19 U5.35 | length 143.5
  Bottom Layer w0.508: J.19 81.748,71.164 81.748,71.846 80.333,73.261 78.123,73.261 76.708,74.676 76.708,100.076 88.9,112.268 133.604,112.268 142.494,121.158 146.05,121.158 147.574,119.634 147.574,95.504 U5.35
servo1: J.9 R1.1 | length 39.4
  Top Layer w0.508: J.9 96.92,63.354 99.568,60.706 102.348,57.926 113.044,57.926 115.062,59.944 v1(115.062,66.04)
  Bottom Layer w0.508: v1(115.062,66.04) 115.208,66.186 115.532,66.186 116.526,67.18 R1.1
servo2: J.11 R22.1 | length 49.5
  Top Layer w0.508: v1(125.222,58.928) v1(125.222,62.23)
  Bottom Layer w0.508: J.11 121.648,55.354 v1(125.222,58.928) ; R22.1 121.836,67.18 124.968,64.048 124.968,64.008 125.052,63.924 125.052,62.4 v1(125.222,62.23)
servo_1: R1.2 R2.1 U5.43 | length 37.6
  Top Layer w0.508: R2.1 R2.1@118.026,67.18 ; v1(119.126,68.58) 118.956,68.41 118.956,68.11 R2.1@118.026,67.18 ; U5.43 130.302,72.136 123.952,65.786 119.42,65.786 R2.1@118.026,67.18
  Bottom Layer w0.508: R1.2 117.994,64.48 118.29,64.776 118.29,65.458 119.03,66.198 119.03,68.484 v1(119.126,68.58)
servo_2: R22.2 R23.1 U5.42 | length 39.5
  Top Layer w0.508: v1(121.412,68.58) 121.412,67.506 R23.1 121.836,67.18 129.078,74.422 143.72,74.422 143.78,74.482 144.332,74.482 U5.42 ; v1(123.444,63.5) 123.571,63.5 125.349,65.278 v1(125.476,65.278)
  Bottom Layer w0.508: R22.2 121.836,64.48 122.646,63.67 123.274,63.67 v1(123.444,63.5) ; v1(121.412,68.58) 121.558,68.726 122.084,68.726 122.091,68.733 122.529,68.733 125.33,65.932 125.33,65.424 v1(125.476,65.278)
SIG3: J.24 MUX1.4 | length 37.6
  Top Layer w0.508: J.24 81.13,95.354 88.392,102.616 102.87,102.616 109.22,96.266 MUX1.4
SIG4: J.25 MUX1.5 | length 37.4
  Top Layer w0.508: J.25 79.963,91.759 79.963,92.663 88.9,101.6 102.108,101.6 107.95,95.758 MUX1.5
SIG5: J.13 MUX1.6 | length 30.7
  Top Layer w0.508: J.13 83.963,93.759 83.963,95.393 89.154,100.584 101.6,100.584 106.68,95.504 MUX1.6
SIG6: J.1 MUX1.7 | length 22.6
  Top Layer w0.508: J.1@87.9,95.012 92.456,99.568 101.346,99.568 105.41,95.504 MUX1.7
SIG7: J.26 MUX1.8 | length 34.3
  Top Layer w0.508: J.26 79.558,87.927 80.176,88.545 80.176,88.654 82.772,91.251 84.772,91.251 86.772,93.25 92.321,93.25 92.964,93.893 92.964,96.774 94.996,98.806 100.838,98.806 104.14,95.504 MUX1.8
SIG8: J.2 MUX1.9 | length 24
  Top Layer w0.508: J.2@87.832,91.628 J.2 88.108,90.804 92.836,90.804 93.98,91.948 93.98,96.52 95.25,97.79 100.584,97.79 102.87,95.504 MUX1.9
SIG9: J.14 MUX1.10 | length 26.2
  Top Layer w0.508: J.14 83.612,89.408 93.218,89.408 94.742,90.932 94.742,95.758 96.012,97.028 100.061,97.028 100.196,96.894 100.21,96.894 101.6,95.504 MUX1.10
SIG10: J.3 MUX1.11 | length 22.7
  Top Layer w0.508: J.3 87.761,87.151 89.633,87.151 89.662,87.122 93.98,87.122 95.504,88.646 95.504,95.504 96.266,96.266 99.822,96.266 100.33,95.758 MUX1.11
SIG11: J.15 MUX1.19 | length 23.7
  Top Layer w0.508: J.15 92.862,85.354 97.914,80.302 100.206,80.302 101.6,81.696 MUX1.19
SIG12: J.4 MUX1.20 | length 20.6
  Top Layer w0.508: J.4 93.86,83.354 97.62,79.594 100.5,79.594 102.87,81.964 MUX1.20
SIG13: J.16 MUX1.21 | length 25.5
  Top Layer w0.508: J.16 83.632,81.28 94.933,81.28 97.327,78.886 100.793,78.886 104.14,82.233 MUX1.21
SIG14: J.5 MUX1.22 | length 22.3
  Top Layer w0.508: J.5 88.108,78.804 96.408,78.804 97.034,78.178 101.086,78.178 105.41,82.502 MUX1.22
SIG15: J.28 MUX1.23 | length 32
  Top Layer w0.508: J.28@79.505,79.251 84.979,79.251 86.772,77.458 88.344,77.458 88.356,77.47 101.379,77.47 106.634,82.725 106.634,84.654 MUX1.23
SIG16: J.6 MUX1.24 | length 25.4
  Top Layer w0.508: J.6 100.5,75.354 107.904,82.758 107.904,84.654 MUX1.24
SIG17: J.17 MUX1.25 | length 33.7
  Top Layer w0.508: J.17 83.558,76.672 86.772,73.458 88.137,73.458 88.696,72.898 99.045,72.898 109.174,83.027 109.174,84.654 MUX1.25
SIG18: J.7 MUX1.26 | length 29.7
  Top Layer w0.508: J.7 88.108,70.804 97.952,70.804 110.444,83.295 110.444,84.654 MUX1.26
pads on no net: J. J.18 J.21 J.29 J.31 J.32 J.33 J.34 MUX1.3 MUX1.13 MUX1.14 P1.6 P3.1 P3.2 P3.3 P3.4 P3.5 P3.6 P3.7 P3.8 P3.9 P3.10 P3.12 P3.13 P3.14 P3.16 P4.3 P4.4 P4.5 U2.5 U5.8 U5.11 U5.15 U5.16 U5.17 U5.18 U5.19 U5.20 U5.21 U5.22 U5.23 U5.24 U5.25 U5.26 U5.27 U5.28 U5.29 U5.30 U5.31 U5.34 U5.41 U5.46 U5.47

## Keep-outs
Keep-Out Layer:
  circle w0.254: c81.28,8.89 r4
  circle w0.254: c182.88,8.89 r4
  circle w0.254: c81.28,121.92 r4

## Silkscreen, mask and mechanical layers (free items; w line width, h text height)
Top Overlay:
  circle w0.254: c168.656,115.316 r1.078
  circle w0.254: c166.37,19.05 r1.27
  circle w0.254: c128.016,21.336 r1.078
  circle w0.254: c128.016,49.276 r1.136
  circle w0.254: c106.426,49.276 r1.136
  circle w0.254: c87.558,95.354 r1.997
  circle w0.254: c133.35,103.886 r1.27
  rectangle: 83.312,12.954 95.504,17.272
  lines w0.254: 94.488,105.314 94.488,124.314 ; 94.688,105.514 139.288,105.514 139.288,124.514 94.688,124.514 ; 101.123,61.181 110.713,61.181 ; 101.123,67.531 110.713,67.531 ; 102.852,60.202 cw(c102.108,60.386) 102.875,60.386 ; 103.886,20.546 103.886,50.546 118.886,50.546 ; 103.914,20.574 118.914,20.574 118.914,50.518 ; 126.746,53.086 122.746,53.086 122.746,5.578 151.066,5.578 151.066,53.086 147.066,53.086 ; 139.028,66.145 cw(c139.628,66.846) 140.167,66.097 ; 185.57,19.25 185.77,19.05 ; 185.57,19.25 185.57,63.85 166.57,63.85 166.57,19.25 166.77,19.05 185.77,19.05 ; 185.57,19.25 185.77,19.05 ; 94.488,106.076 94.688,106.276 94.488,106.076 ; 165.216,99.822 172.466,99.822 179.716,99.822 179.716,119.126 172.466,119.126 165.216,119.126 165.216,99.822
  text "LM2596 / Buck Converter" at 103.378,114.046 h1.52
  text "ESP8266" at 167.132,107.696 h1.52
  text "HC-12" at 108.204,34.798 h1.52
  text "CH376S" at 133.096,30.226 h1.52
  text "DJSR E03" at 83.566,27.686 h1.52
  text "DAQ" at 87.122,24.638 h1.52
  text "www.djsracing.com" at 77.724,22.352 h1.52
  text "PCB No." at 84.836,17.78 h1.52
  text "GND" at 106.172,12.954 h1.52

## Text inside footprints (layer, text, board x,y; h text height)
M1: Mechanical 13 "2" at 127.134,93.77 h0.81 r90; Mechanical 13 "3" at 127.134,91.27 h0.81 r90; Mechanical 13 "1" at 127.134,96.27 h0.81 r90
M2: Mechanical 13 "2" at 133.484,93.77 h0.81 r90; Mechanical 13 "3" at 133.484,91.27 h0.81 r90; Mechanical 13 "1" at 133.484,96.27 h0.81 r90
M3: Mechanical 13 "1" at 127.206,88.566 h0.81 r90; Mechanical 13 "3" at 127.206,83.566 h0.81 r90; Mechanical 13 "2" at 127.206,86.066 h0.81 r90
M4: Mechanical 13 "2" at 133.484,86.15 h0.81 r90; Mechanical 13 "3" at 133.484,83.65 h0.81 r90; Mechanical 13 "1" at 133.484,88.65 h0.81 r90
M5: Mechanical 13 "1" at 127.134,81.03 h0.81 r90; Mechanical 13 "3" at 127.134,76.03 h0.81 r90; Mechanical 13 "2" at 127.134,78.53 h0.81 r90
M6: Mechanical 13 "1" at 133.484,81.03 h0.81 r90; Mechanical 13 "3" at 133.484,76.03 h0.81 r90; Mechanical 13 "2" at 133.484,78.53 h0.81 r90
P1: Top Overlay "6" at 130.048,14.732 h1.27 r270; Top Overlay "5" at 127.508,14.732 h1.27 r270; Top Overlay "2" at 130.048,23.876 h1.27 r270; Top Overlay "1" at 127.508,23.368 h1.27 r270
P3: Top Overlay "2" at 125.476,51.308 h1.27; Top Overlay "1" at 125.476,48.768 h1.27; Top Overlay "15" at 147.32,48.768 h1.27; Top Overlay "16" at 147.32,51.308 h1.27
P4: Top Overlay "7" at 177.8,114.808 h1.27; Top Overlay "8" at 177.8,117.348 h1.27; Top Overlay "1" at 166.624,114.808 h1.27; Top Overlay "2" at 166.116,117.348 h1.27
U3: Top Overlay "OUT-" at 184.246,61.468 h1 r90; Top Overlay "OUT+" at 168.752,61.468 h1 r90; Top Overlay "IN-" at 184.246,18.288 h1 r90; Top Overlay "IN+" at 168.498,18.288 h1 r90; Top Overlay "LM2596 / Buck Converter" at 177.8,35.306 h1 r90
U5: Top Overlay "G" at 161.798,58.928 h1.02; Top Overlay "G" at 141.986,94.234 h1.02; Top Overlay "G" at 141.986,61.468 h1.02; Top Overlay "Teensy 4.1" at 153.67,87.376 h1.78 r90